# Altium PCB 5V_to_3V3_LDO.PcbDoc..PcbDoc
Units mil, origin at the board's own origin, x right, y up, seen from the top; angles counter-clockwise.
Board outline 6000 x 4000 mil, 2 copper layers (Top Layer, Bottom Layer); 9 components, 5 nets, 22 pads, 4 vias.
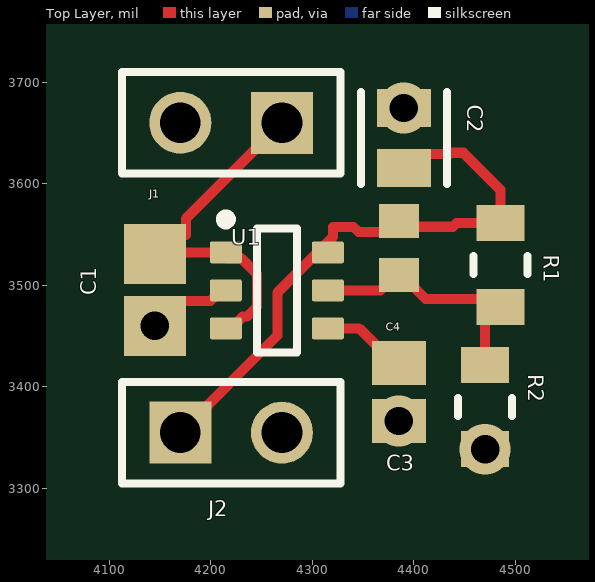
[diagram p0: Top Layer view]
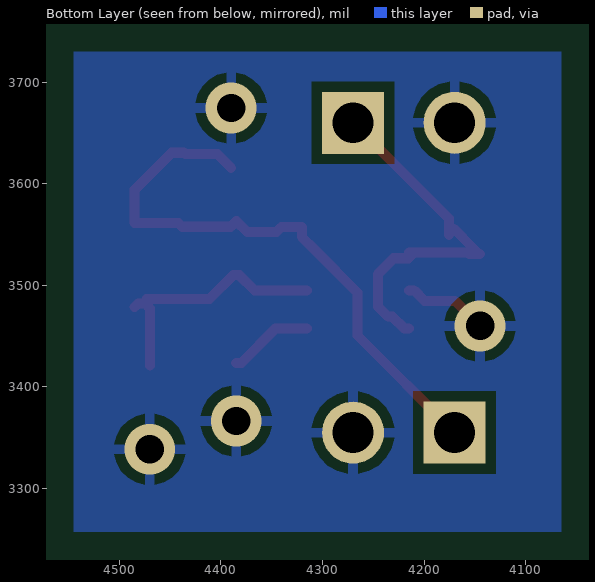
[diagram p1: Bottom Layer view, seen from below]
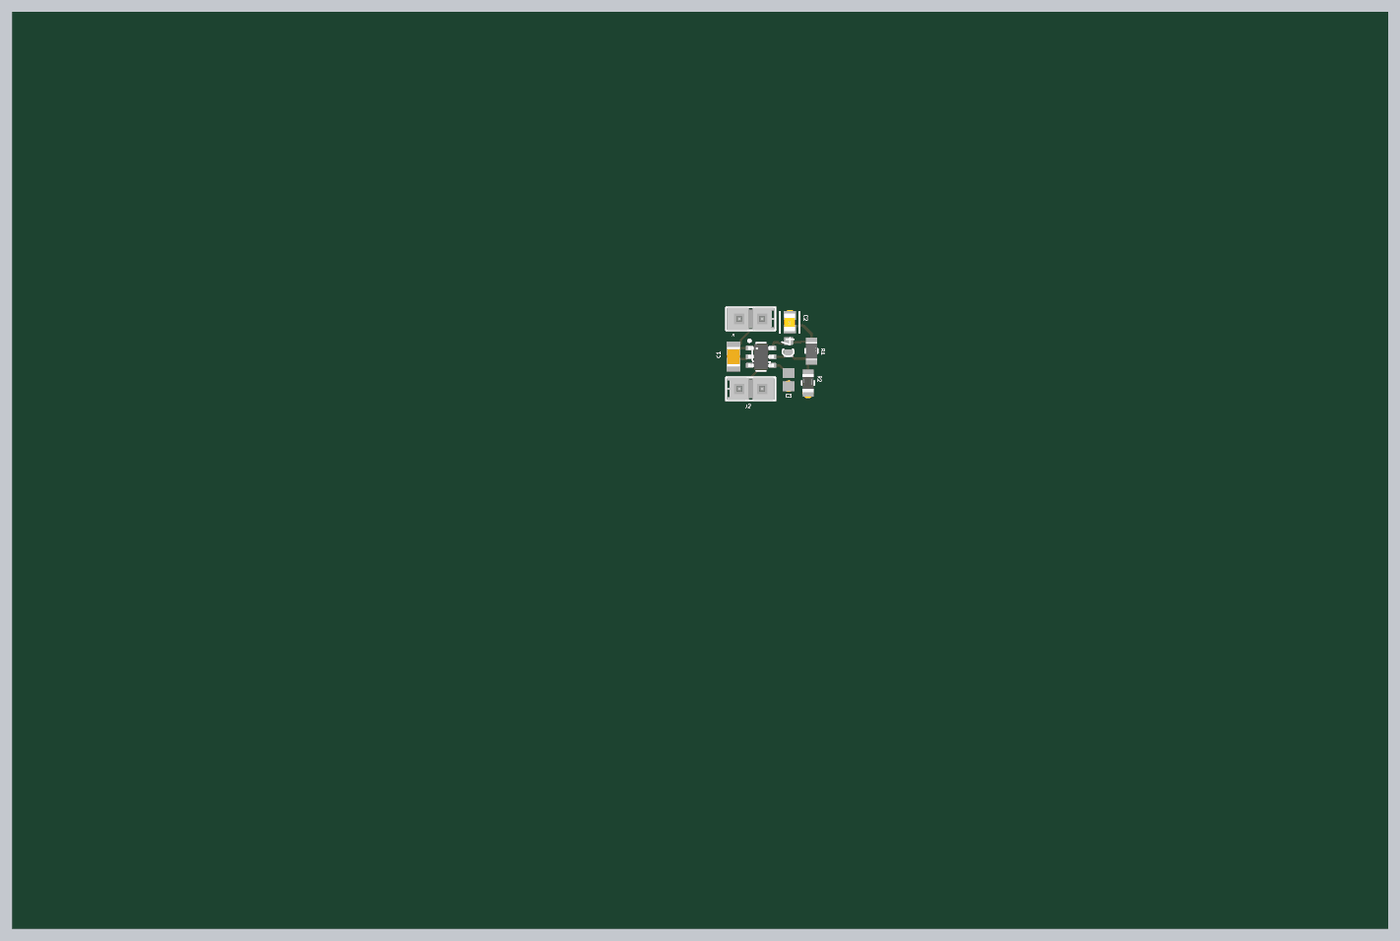
[diagram p2: 3D render of the assembled board from above, using the file's embedded part models]

## Layer stack, top to bottom
Top Solder: solder mask 0.4, Solder Resist, Dk 3.5
Top Layer: signal copper 1.4
Dielectric 1: dielectric 12.6, FR-4, Dk 4.8
Bottom Layer: signal copper 1.4
Bottom Solder: solder mask 0.4, Solder Resist, Dk 3.5

## Board outline
1000,1000 7000,1000 7000,5000 1000,5000

## Design rules (kind name [scope] priority, off if disabled: settings)
Clearance [All] p1: gap=10 ignorepadtopadclearanceinfootprint=FALSE
PolygonConnect [All] p1: connectstyle=Relief reliefconductorwidth=10 reliefentries=4 polygonreliefangle="90 Angle" airgapwidth=10
RoutingVias [All] p1: holewidth=28 width=50 viastyle="Through Hole" minholewidth=28 minwidth=50 maxholewidth=28 maxwidth=50
SolderMaskExpansion [All] p1: expansion=0 istentingtop=FALSE
SupplyNets "Schematic Supply Nets" [InNet('GND')] p1: voltage=0.000
Width [All] p1: maxlimit=10 minlimit=10 preferedwidth=10
30 further rules are at their usual default settings.

## Classes and differential pairs
component class 5V_to_3v3_LDO: C1 C2 C3 C4 J1 J2 R1 U1

## Components (designator, comment, footprint, x,y, rotation, side; value= is the part's Value field where it differs from the comment)
C1 "Capacitor 1 uF +/- 10% 25 V 0805" CAPC2013X145X50ML20T25 4145,3495.43 r270 top value=1µF
C2 "C0805C225K4RACAUTO" FP-C0805C225K4RACAUTO-MFG 4390,3645 r90 top
C3 "VJ0805Y103KXAMP" CAPC2013X145X48LL20T23 4385,3395 r270 top
C4 "VJ0603A150JXAAT" CAPC1608X92X38NL15T08 4385,3536.57 r90 top
J1 "TSW-102-26-F-S" SMTC-TSW-102-26-XX-S 4270,3660 r180 top
J2 "TSW-102-26-F-S" SMTC-TSW-102-26-XX-S 4170,3355 r0 top
R1 "AC0805FR-0751KL" FP-AC0805-MFG 4485,3520 r90 top value=51KΩ
R2 "RT0805BRD0730K1L" FP-RT0805-MFG 4470,3380 r90 top value=30.1KΩ
U1 "TPS79301MDBVREP" DBV0006A_L 4265,3495 r0 top

## Footprints (in the part's own frame and the unit in brackets; to place one, negate y for a bottom-side part, rotate by r counter-clockwise, add the part's x,y. Pads: shape width x height; smd on the part's side, far side on the other; paste and mask are expansions set on the pad)
CAPC1608X92X38NL15T08 [mm] "Chip Capacitor, 2-Leads, Body 1.60x0.80mm, IPC Medium Density"
  rect 0.85x1 smd: 1(-0.675,0) 2(0.675,0)
  body extent -0.87,-0.48 0.87,0.47, height 0.92
CAPC2013X145X48LL20T23 [mm] "Chip Capacitor, 2-Leads, Body 2.00x1.25mm, IPC High Density"
  rect 1.1x1.35 smd: 1(-0.725,0) 2(0.725,0)
  body extent -1.1,-0.72 1.1,0.72, height 1.45
CAPC2013X145X50ML20T25 [mm] "Chip Capacitor, 2-Leads, Body 2.2x1.45mm, IPC Low Density"
  rect 1.5x1.55 smd: 1(-0.9,0) 2(0.9,0)
  body extent -1.1,-0.72 1.1,0.73, height 1.45
DBV0006A_L [mm] "SOT23, 6-Leads, Body 3.05x1.75mm, Pitch 0.95mm, IPC High Density"
  rrect18% 0.8x0.55 smd: 1(-1.275,0.95) 2(-1.275,0) 3(-1.275,-0.95) 4(1.275,-0.95) 5(1.275,0) 6(1.275,0.95)
  silkscreen extent -1.4,-1.55 0.5,1.9, body extent -1.42,-1.46 1.42,1.46, height 1.11
FP-AC0805-MFG [mm]
  rect 0.9x1.2 smd paste+0 mask+0: 1(-1.05,0) 2(1.05,0)
  silkscreen extent -0.23,-0.67 0.23,0.67, body extent -1.6,-0.77 1.6,0.77, height 0.25
FP-C0805C225K4RACAUTO-MFG [mm]
  rect 0.95x1.35 smd paste+0 mask+0: 1(-0.75,0) 2(0.75,0)
  silkscreen extent -1.15,-1.07 1.15,1.07, body extent -1.4,-0.85 1.4,0.85, height 0.25
FP-RT0805-MFG [mm]
  rect 0.9x1.2 smd paste+0 mask+0: 1(-1.05,0) 2(1.05,0)
  silkscreen extent -0.23,-0.67 0.23,0.67, body extent -1.6,-0.77 1.6,0.77, height 0.25
SMTC-TSW-102-26-XX-S [mm] ".025 SQ Post Terminal Strip Assembly, 1x2 Pins, Vertical, 2.54mm Pitch, Male"
  rect 1.55x1.55 hole 1.02: 1(0,0)
  round 1.55 hole 1.02: 2(2.54,0)
  silkscreen extent -1.46,-1.27 4,1.27, body extent -1.4,-1.27 3.81,1.27, height 8.38

## Part data
C1: library part CMP-001-00010-6, "Chip Capacitor, 1 uF, +/-10%, 25 V, 0805 (2012 Metric)", Capacitor Type=Ceramic, Case/Package=0805, Max Operating Temperature=125°C, Min Operating Temperature=-55°C, Tolerance=10%, Voltage Rating=25V, Mounting Technology=SM, Pins=2, RoHS Compliant=True
C2: library part Capacitor, "Capacitor", Capacitance=2.2uF, Case Code (Imperial)=0805, Case Code (Metric)=2012, Dielectric=X7R, Dielectric Material=Ceramic, Max Operating Temperature=125°C, Min Operating Temperature=-55°C, Package Quantity=1, Ratings=AEC-Q200, Tolerance=10%, Voltage Rating=16V, Case/Package=0805, Construction=Flat, Contact Plating=Tin, Depth=1.25mm, Height=1.25mm, Length=0.079inch, Mount="Surface Mount", Packaging="Cut Tape", Radiation Hardening=No, REACH SVHC="No SVHC", RoHS Compliant=Yes, Series=C, Thickness=0.055inch, Voltage Rating (DC)=16V, Width=0.049inch
C3 C4: library part Capacitor, "Capacitor", Manufacturer=Vitramon
  C3: Part Number=VJ0805Y103KXAMP
  C4: Part Number=VJ0603A150JXAAT
J1 J2: library part CMP-1024-00329-1, "0.025\" SQ Post Header, Through-hole, Vertical, -55 to 125 degC, 2.54 mm Pitch, 2-Pin, Male, RoHS", Manufacturer=Samtec, Temperature Range="-55 to 125 degC", ComponentLink1Description="Manufacturer URL", ComponentLink1URL=http://www.samtec.com, ComponentLink2Description=Datasheet, ComponentLink2URL=http://www.samtec.com/documents/webfiles/pdf/TSW_TH.PDF, ComponentLink3Description="Package Specification", ComponentLink3URL=http://www.samtec.com/documents/webfiles/cpdf/TSW-XXX-XX-XXX-X-XX-XXX-MKT.pdf, DatasheetVersion=F-214, Mounting Technology=Through-hole, Orientation=Vertical, PackageDescription=".025[0.64] SQ. Post Terminal Strip Assembly", PackageReference=TSW-102-26-XX-S, PackageVersion="DM, 8/1988", PartNumber=TSW-102-26-F-S, Pitch="2.54 mm", RoHS=True
R1: library part Resistor, "Resistor", Manufacturer=Yageo, Package=AC0805, Power Rating=1/8W, Resistance=51KΩ, Temperature="-55°C to +155°C", Temperature Range High=+155°C, Temperature Range Low=-55°C, Tolerance=0.01, Voltage Rating=150V, Automotive=Yes, Automotive Grade="Grade 0", Category=Res, ComponentLink2Description=Datasheet, ComponentLink2URL=http://www.yageo.com/documents/recent/PYu-AC_51_RoHS_L_6.pdf, Composition="Thick Film", Device Class L1="Passive Components", Device Class L2=Resistors, Device Class L3="Chip SMD Resistors", Digikey Description="RES SMD 51K OHM 1% 1/8W 0805", Footprint Url=http://www.yageo.com/exep/pages/download/literatures/PYu-R_Mount_10.pdf, Height=0.6mm, Ipc Land Pattern Name=RESC200125X50, Lead Free=Yes, Manufacturer Part Number=AC0805FR-0751KL, Mouser Description="Thick Film Resistors - SMD 1/8W 51K ohm 1%", Octopart=https://octopart.com/ac0805fr-0751kl-yageo-24874955, RoHS=TRUE, Series=AC
R2: library part Resistor, "Resistor", Manufacturer=Yageo, Package=RT0805, Power Rating=0.125W, Resistance=30.1KΩ, Temperature="-55°C to +155°C", Temperature Coefficient="25 ppm/°C", Temperature Range High=+155°C, Temperature Range Low=-55°C, Tolerance=0.0025, Voltage Rating=150V, Automotive=No, Category=Res, ComponentLink2Description=Datasheet, ComponentLink2URL=http://www.yageo.com/documents/recent/PYu-RT_1-to-0.01_RoHS_L_9.pdf, Composition="Thin Film", Device Class L1="Passive Components", Device Class L2=Resistors, Device Class L3="Chip SMD Resistors", Digikey Description="RES SMD 30.1K OHM 0.1% 1/8W 0805", Footprint Url=http://www.yageo.com/exep/pages/download/literatures/PYu-R_Mount_10.pdf, Height=0.6mm, Ipc Land Pattern Name=RESC200125X50, Lead Free=Yes, Manufacturer Part Number=RT0805BRD0730K1L, Mouser Description="Thin Film Resistors - SMD 1/8W 30.1K ohm .1% 25ppm", Octopart=https://octopart.com/rt0805brd0730k1l-yageo-1452498, RoHS=TRUE, Series=RT
U1: library part CMP-0394-00788-2, "Single Output Fast RF LDO, 200 mA, Adjustable 1.2 to 5.5 V Output, 2.7 to 5.5 V Input, 6-pin SOT-23 (DBV), -55 to 125 degC, Green (RoHS & no Sb/Br)", Manufacturer="Texas Instruments", Rating="HiRel Enhanced Product", Accuracy(%)=2, Code_JEDEC=MO-178, ComponentLink1Description="Manufacturer URL", ComponentLink1URL=http://www.ti.com/, ComponentLink2Description=Datasheet, ComponentLink2URL=http://www.ti.com/general/docs/lit/getliterature.tsp?genericPartNumber=TPS79301-EP&fileType=pdf, ComponentLink3Description="Package Specification", ComponentLink3URL=http://www.ti.com/litv/pdf/mpds026h, DatasheetVersion=SGLS163B, Eco-Plan="Green (RoHS & no Sb/Br)", Iout(Max)(A)=0.2, Iq(Typ)(mA)=0.2, Mounting Technology="Surface Mount", PackageDescription="6-Pin Plastic Small Outline, Body 1.60 Ãƒâ€” 2.90 mm, Pitch 0.95 mm", PackageReference=DBV0006A, PackageVersion=4073253-5/K, PartNumber=TPS79301MDBVREP, SubFamily="Single Channel LDO", Vdo(Typ)(mV)=112, Vin(Max)(V)=5.5, Vin(Min)(V)=2.7, Vout Adj(Max)(V)=5.5, Vout Adj(Min)(V)=1.2

## Via types
v1: diameter 50, hole 28, Top Layer to Bottom Layer, 4 vias

## Nets (pads, with @x,y where several pads share a name; then routed paths per layer and width w, separated by ;. In a path a pad name is that pad's centre, name@x,y a point inside that pad or via, vN(x,y) a via of type N, cw(c..) or ccw(c..) an arc to the next point about the centre after c; other vN are vias at no path point)
+3V3_OUT: C2.1 C4.2 J2.1 R1.2 U1.6 | length 588.6
  Top Layer w10: J2.1 4265.55,3450.55 4265.55,3492.76 4307.74,3534.94 4320.2,3547.4 4320.2,3557.4 4340.5,3557.4 4345.31,3552.59 4374.44,3552.59 C4.2 4390.51,3557.64 4438.35,3557.64 4442.05,3561.34 R1.2 4485,3594.06 4448.58,3630.47 4436.57,3630.47 4435.28,3629.17 4403.7,3629.17 C2.1
+5V_IN: C1.1 J1.1 U1.1 U1.3 | length 371.7
  Top Layer w10: C1.1@4170.51,3555.39 4152.89,3537.78 4145.98,3530.87 C1.1 4155.87,3530.87 4157.4,3532.4 U1.1 ; 4175.51,3549.53 4175.51,3565.51 J1.1 ; U1.1@4209.88,3532.4 4215.71,3526.57 4229.87,3526.57 4245.55,3510.9 4245.55,3479.1 4235.62,3469.17 4231.3,3469.17 4219.72,3457.6 U1.3
GND: C1.2 C2.2 C3.2 J1.2 J2.2 R2.1 U1.2 | length 84.3
  Top Layer w10: v1(4145,3460) 4169.53,3484.53 4199.41,3484.53 4209.88,3495 U1.2
  other v1: 4470,3338.66 4385,3366.46 4390,3674.53
NetC3_1: C3.1 U1.4 | length 83.9
  Top Layer w10: U1.4 4346.02,3457.6 4380.08,3423.54 C3.1
NetC4_1: C4.1 R1.1 R2.2 U1.5 | length 248
  Top Layer w10: U1.5 4367.05,3495 4382.05,3510 4387.95,3510 4411.26,3486.69 R1.1@4473.03,3486.69 ; R2.2 4470,3477.28 4474.78,3482.07 4481.59,3482.07 R1.1

## Polygon pours and split planes (outlines as drawn)
GND on Bottom Layer "GND_L02_P002" (solid, pour order 2): 4065,3730 4545,3730 4545,3645 4545,3257.5 4065,3257.5